# Altium PCB Copy of main - shifted.PcbDoc (part 5 of 15)
Units mil, origin at the board's own origin, x right, y up, seen from the top; angles counter-clockwise.
Board outline 8394.55 x 5164.44 mil, 7 copper layers (Top Layer 1, Layer 2, Layer 3, Unused, Layer 4_pow, Layer 5_gnd, Bottom 6+gnd), stack 46.112 mil thick; 363 components, 409 nets, 1750 pads, 991 vias.
Unrouted connection lines stored in the file: 111.
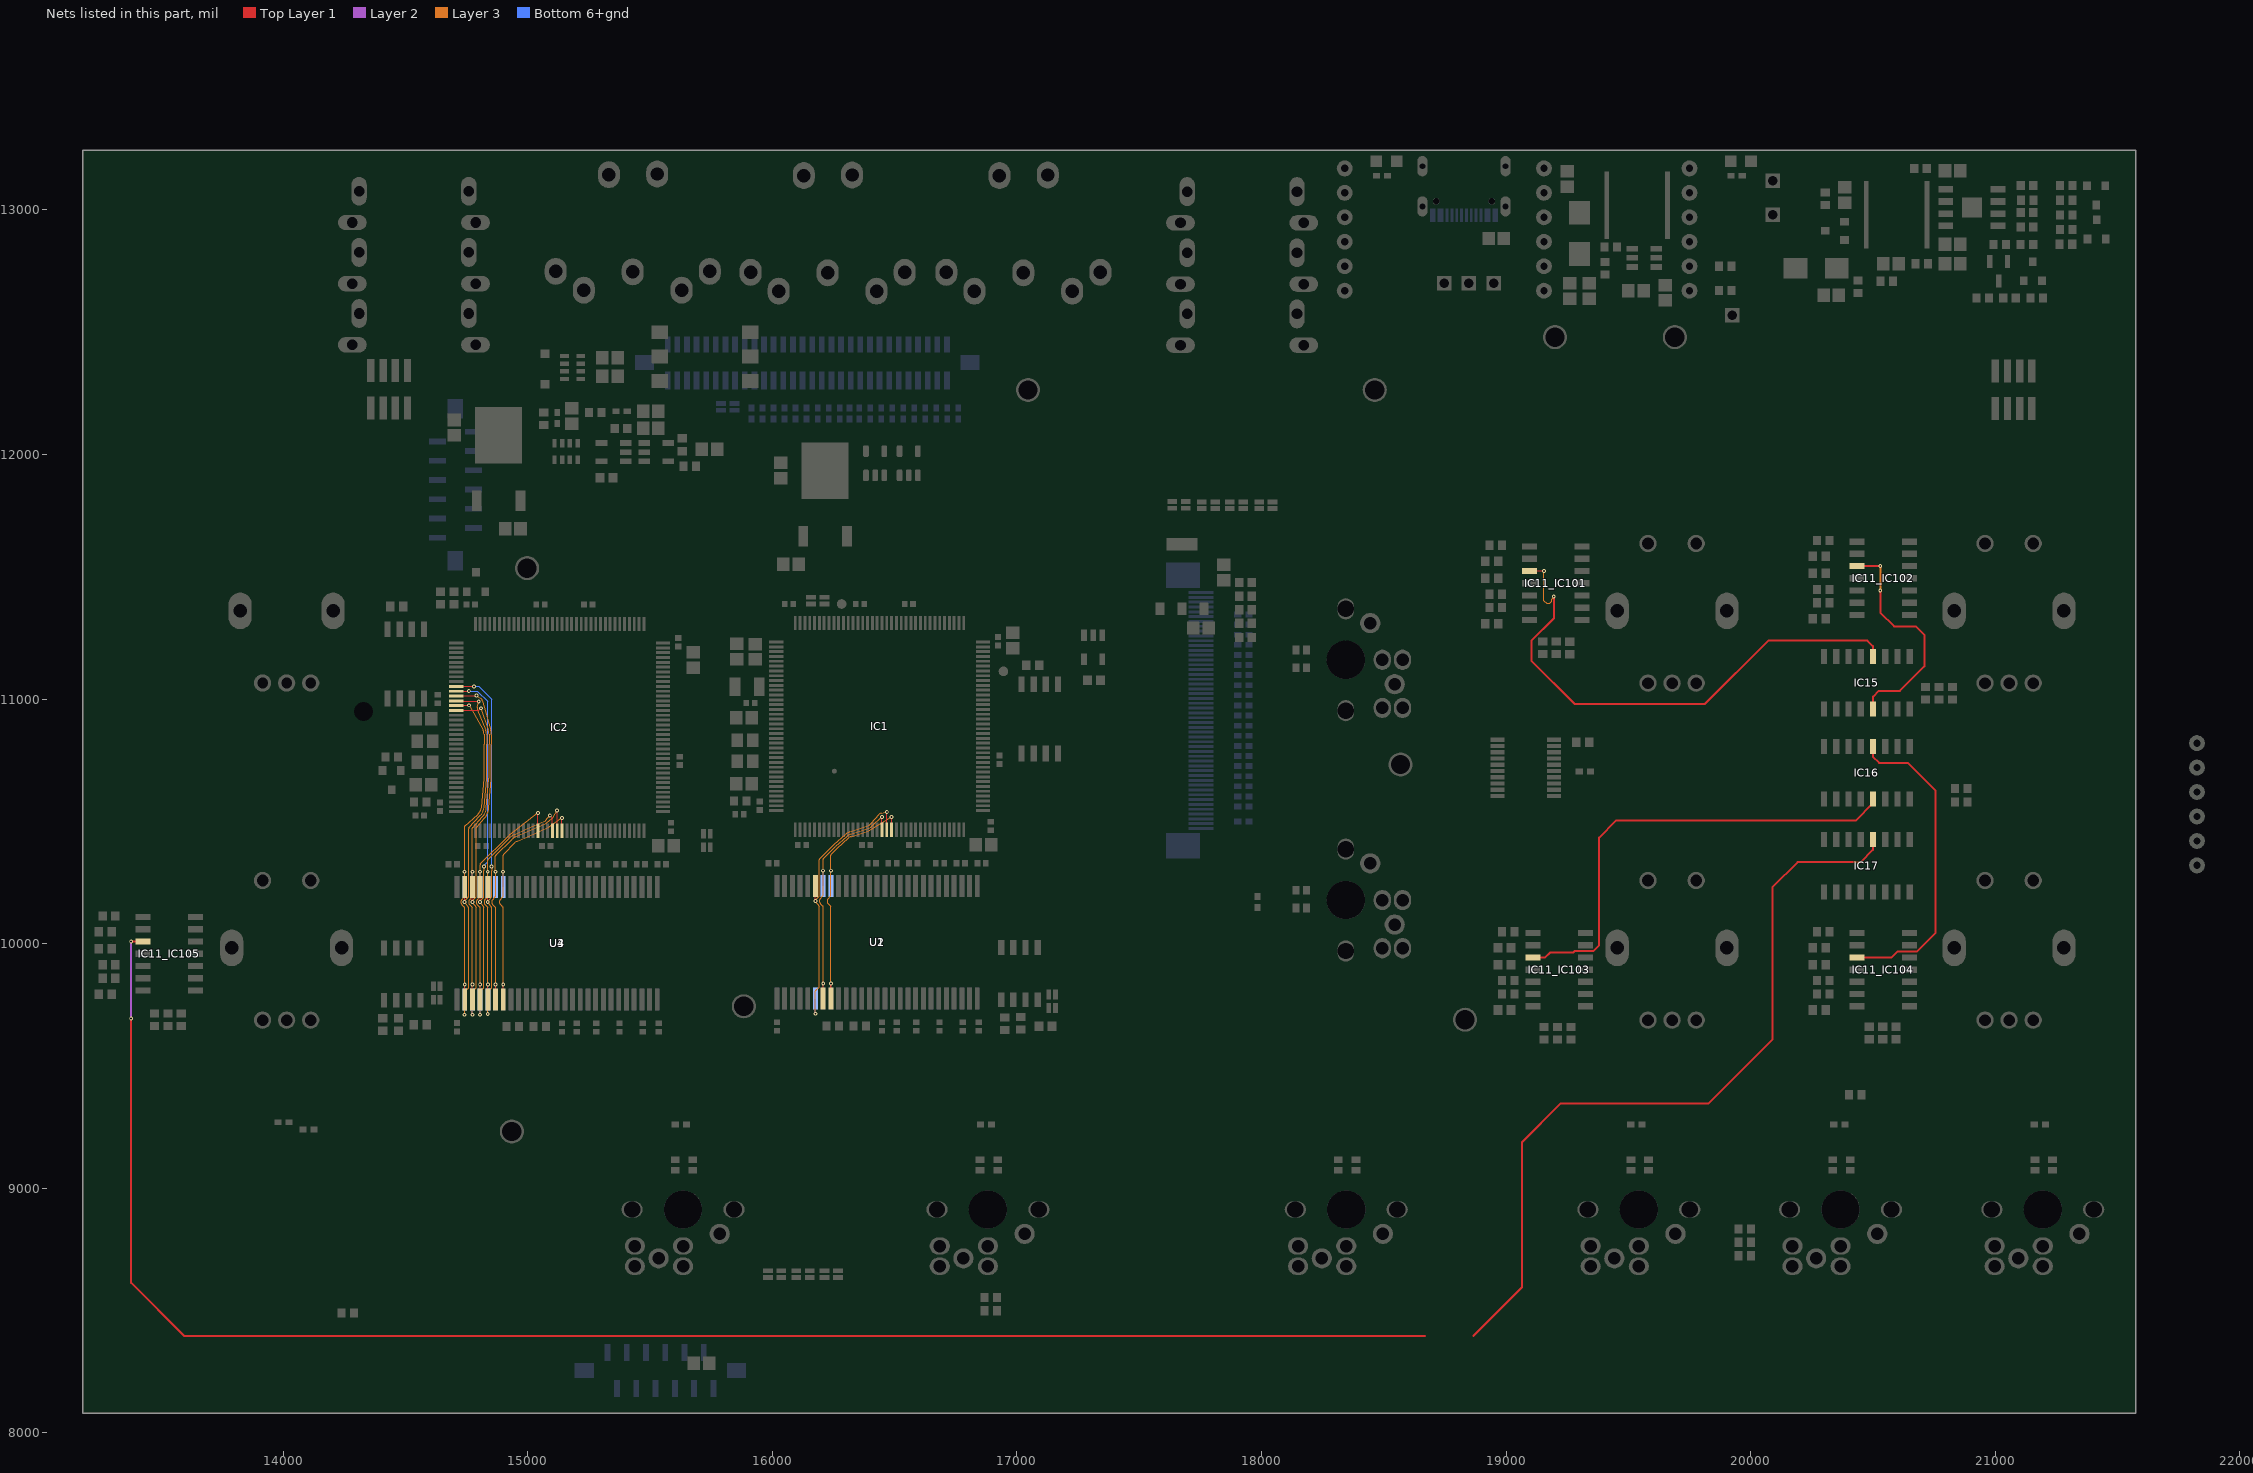
[diagram p8: the nets of this part, all layers, seen from the top]

## Via types
v1: diameter 15.75, hole 7.87, Top Layer 1 to Bottom 6+gnd, tented both sides, 923 vias
v2: diameter 27.56, hole 11.81, Top Layer 1 to Bottom 6+gnd, 45 vias
v3: diameter 23.62/23.62/23.62/23.62/23.62/23.62/23.62 (per signal layer), hole 12, Top Layer 1 to Bottom 6+gnd, tented top, 10 vias
v4: diameter 15.75, hole 7.87, Top Layer 1 to Bottom 6+gnd, 10 vias
v5: diameter 23.62/23.62/23.62/23.62/23.62/23.62/23.62 (per signal layer), hole 12, Top Layer 1 to Bottom 6+gnd, tented bottom, 3 vias

## Nets (pads, with @x,y where several pads share a name; then routed paths per layer and width w, separated by ;. In a path a pad name is that pad's centre, name@x,y a point inside that pad or via, vN(x,y) a via of type N, cw(c..) or ccw(c..) an arc to the next point about the centre after c; other vN are vias at no path point) (continued)
A9: IC1.55 U1.34 U2.34 | length 1531.6
  Top Layer 1 w5: U1.34@16207.68,9775.59 v1@16207.68,9837.43 ; U1.34@16207.92,9775.83 v1(16207.92,9837.68) ; U1.34@16208.17,9775.59 v1@16208.17,9837.43 ; IC1.55@16447.99,10466.06 v1@16447.99,10518.35
  Layer 3 w5: v1(16207.92,9837.68) 16207.92,10149.83 ; 16207.92,10199.75 16207.92,10297.82 v1(16207.43,10298.31) 16207.43,10344.65 ; v1(16447.76,10518.58) 16407.89,10481.61 cw(c16370.24,10522.2) 16387.41,10469.56 16319.11,10447.27 ; 16206.47,10153.31 cw(c16202.92,10149.78) 16207.92,10149.87 ; 16206.47,10153.31 cw(c16202.92,10149.78) 16207.92,10149.87 ; 16206.47,10153.31 cw(c16202.92,10149.78) 16207.92,10149.87 ; 16206.47,10153.31 cw(c16202.92,10149.78) 16207.92,10149.87 ; 16206.47,10153.31 cw(c16202.92,10149.78) 16207.92,10149.87 ; 16206.47,10153.31 cw(c16202.92,10149.78) 16207.92,10149.87 ; 16206.47,10153.31 cw(c16202.92,10149.78) 16207.92,10149.87 ; 16206.47,10153.31 cw(c16202.92,10149.78) 16207.92,10149.87 ; 16206.47,10153.31 cw(c16202.92,10149.78) 16207.92,10149.87 ; 16206.47,10153.31 cw(c16202.92,10149.78) 16207.92,10149.87 ; 16206.47,10153.31 cw(c16202.92,10149.78) 16207.92,10149.87 ; 16206.47,10153.31 cw(c16202.92,10149.78) 16207.92,10149.87 ; 16206.47,10153.31 cw(c16202.92,10149.78) 16207.92,10149.87 ; 16206.47,10153.31 cw(c16202.92,10149.78) 16207.92,10149.87 ; 16206.47,10153.31 cw(c16202.92,10149.78) 16207.92,10149.87 ; 16206.47,10153.31 cw(c16202.92,10149.78) 16207.92,10149.87 ; 16206.47,10153.31 16196.54,10163.28 cw(c16207.43,10174.13) 16195.91,10184.31 16206.67,10196.48 ; 16206.67,10196.48 ccw(c16202.92,10199.79) 16207.92,10199.7 ; 16206.67,10196.48 ccw(c16202.92,10199.79) 16207.92,10199.7 ; 16206.67,10196.48 ccw(c16202.92,10199.79) 16207.92,10199.7 ; 16206.67,10196.48 ccw(c16202.92,10199.79) 16207.92,10199.7 ; 16206.67,10196.48 ccw(c16202.92,10199.79) 16207.92,10199.7 ; 16206.67,10196.48 ccw(c16202.92,10199.79) 16207.92,10199.7 ; 16206.67,10196.48 ccw(c16202.92,10199.79) 16207.92,10199.7 ; 16206.67,10196.48 ccw(c16202.92,10199.79) 16207.92,10199.7 ; 16206.67,10196.48 ccw(c16202.92,10199.79) 16207.92,10199.7 ; 16206.67,10196.48 ccw(c16202.92,10199.79) 16207.92,10199.7 ; 16206.67,10196.48 ccw(c16202.92,10199.79) 16207.92,10199.7 ; 16206.67,10196.48 ccw(c16202.92,10199.79) 16207.92,10199.7 ; 16206.67,10196.48 ccw(c16202.92,10199.79) 16207.92,10199.7 ; 16206.67,10196.48 ccw(c16202.92,10199.79) 16207.92,10199.7 ; 16206.67,10196.48 ccw(c16202.92,10199.79) 16207.92,10199.7 ; 16206.67,10196.48 ccw(c16202.92,10199.79) 16207.92,10199.7 ; 16207.43,10344.65 cw(c16212.43,10344.65) 16208.88,10348.17 ; 16207.43,10344.65 cw(c16212.43,10344.65) 16208.88,10348.17 ; 16207.43,10344.65 cw(c16212.43,10344.65) 16208.88,10348.17 ; 16207.43,10344.65 cw(c16212.43,10344.65) 16208.88,10348.17 ; 16207.43,10344.65 cw(c16212.43,10344.65) 16208.88,10348.17 ; 16207.43,10344.65 cw(c16212.43,10344.65) 16208.88,10348.17 ; 16207.43,10344.65 cw(c16212.43,10344.65) 16208.88,10348.17 ; 16207.43,10344.65 cw(c16212.43,10344.65) 16208.88,10348.17 ; 16207.43,10344.65 cw(c16212.43,10344.65) 16208.88,10348.17 ; 16207.43,10344.65 cw(c16212.43,10344.65) 16208.88,10348.17 ; 16207.43,10344.65 cw(c16212.43,10344.65) 16208.88,10348.17 ; 16207.43,10344.65 cw(c16212.43,10344.65) 16208.88,10348.17 ; 16207.43,10344.65 cw(c16212.43,10344.65) 16208.88,10348.17 ; 16207.43,10344.65 cw(c16212.43,10344.65) 16208.88,10348.17 ; 16207.43,10344.65 cw(c16212.43,10344.65) 16208.88,10348.17 ; 16207.43,10344.65 cw(c16212.43,10344.65) 16208.88,10348.17 ; 16208.88,10348.17 16257.8,10397.09 ; 16257.8,10397.09 cw(c16275.42,10379.36) 16258.92,10398.14 ; 16257.8,10397.09 cw(c16275.42,10379.36) 16258.92,10398.14 ; 16257.8,10397.09 cw(c16275.42,10379.36) 16258.92,10398.14 ; 16257.8,10397.09 cw(c16275.42,10379.36) 16258.92,10398.14 ; 16257.8,10397.09 cw(c16275.42,10379.36) 16258.92,10398.14 ; 16257.8,10397.09 cw(c16275.42,10379.36) 16258.92,10398.14 ; 16257.8,10397.09 cw(c16275.42,10379.36) 16258.92,10398.14 ; 16257.8,10397.09 cw(c16275.42,10379.36) 16258.92,10398.14 ; 16257.8,10397.09 cw(c16275.42,10379.36) 16258.92,10398.14 ; 16257.8,10397.09 cw(c16275.42,10379.36) 16258.92,10398.14 ; 16257.8,10397.09 cw(c16275.42,10379.36) 16258.92,10398.14 ; 16257.8,10397.09 cw(c16275.42,10379.36) 16258.92,10398.14 ; 16257.8,10397.09 cw(c16275.42,10379.36) 16258.92,10398.14 ; 16257.8,10397.09 cw(c16275.42,10379.36) 16258.92,10398.14 ; 16257.8,10397.09 cw(c16275.42,10379.36) 16258.92,10398.14 ; 16257.8,10397.09 cw(c16275.42,10379.36) 16258.92,10398.14 ; 16258.92,10398.14 16306.51,10440.1 ; 16306.51,10440.1 cw(c16329.94,10413.6) 16319.11,10447.27 ; 16306.51,10440.1 cw(c16329.94,10413.6) 16319.11,10447.27 ; 16306.51,10440.1 cw(c16329.94,10413.6) 16319.11,10447.27 ; 16306.51,10440.1 cw(c16329.94,10413.6) 16319.11,10447.27 ; 16306.51,10440.1 cw(c16329.94,10413.6) 16319.11,10447.27 ; 16306.51,10440.1 cw(c16329.94,10413.6) 16319.11,10447.27 ; 16306.51,10440.1 cw(c16329.94,10413.6) 16319.11,10447.27 ; 16306.51,10440.1 cw(c16329.94,10413.6) 16319.11,10447.27 ; 16306.51,10440.1 cw(c16329.94,10413.6) 16319.11,10447.27 ; 16306.51,10440.1 cw(c16329.94,10413.6) 16319.11,10447.27 ; 16306.51,10440.1 cw(c16329.94,10413.6) 16319.11,10447.27 ; 16306.51,10440.1 cw(c16329.94,10413.6) 16319.11,10447.27 ; 16306.51,10440.1 cw(c16329.94,10413.6) 16319.11,10447.27 ; 16306.51,10440.1 cw(c16329.94,10413.6) 16319.11,10447.27 ; 16306.51,10440.1 cw(c16329.94,10413.6) 16319.11,10447.27 ; 16306.5,10440.1 cw(c16329.94,10413.6) 16319.11,10447.27
  Bottom 6+gnd w5: U2.34@16207.68,10236.22 v1@16207.68,10298.06
A10: IC1.56 U1.22 U2.22 | length 1769.5
  Top Layer 1 w5: v1@16175.94,10174.38 U1.22@16175.94,10235.97 ; IC1.56@16467.84,10465.9 v1@16467.84,10538.5
  Layer 3 w5: v1(16175.94,9713.5) 16175.94,9805.11 cw(c16180.94,9805.12) 16177.38,9808.63 16190.6,9821.89 ; v1(16175.94,10174.13) ccw(c16180.09,10176.92) 16176.02,10174.01 16191.13,10152.83 ; v1@16175.94,10179.83 16175.94,10179.7 cw(c16180.09,10176.92) 16176.52,10180.41 16190.6,10194.54 ; 16192.06,9825.38 16192.06,10150.02 ; 16252.27,10405.61 ccw(c16275.42,10379.36) 16250.75,10404.18 16193.5,10346.93 ; 16252.28,10405.61 16299.92,10447.63 cw(c16329.94,10413.6) 16315.98,10456.77 16384.31,10479.07 ; v1(16467.76,10538.58) 16444.54,10533.62 ccw(c16447.76,10518.58) 16436.18,10528.7 16404.4,10492.34 ; 16190.6,9821.89 ccw(c16187.06,9825.42) 16192.06,9825.33 ; 16190.6,9821.89 ccw(c16187.06,9825.42) 16192.06,9825.33 ; 16190.6,9821.89 ccw(c16187.06,9825.42) 16192.06,9825.33 ; 16190.6,9821.89 ccw(c16187.06,9825.42) 16192.06,9825.33 ; 16190.6,9821.89 ccw(c16187.06,9825.42) 16192.06,9825.33 ; 16190.6,9821.89 ccw(c16187.06,9825.42) 16192.06,9825.33 ; 16190.6,9821.89 ccw(c16187.06,9825.42) 16192.06,9825.33 ; 16190.6,9821.89 ccw(c16187.06,9825.42) 16192.06,9825.33 ; 16190.6,9821.89 ccw(c16187.06,9825.42) 16192.06,9825.33 ; 16190.6,9821.89 ccw(c16187.06,9825.42) 16192.06,9825.33 ; 16190.6,9821.89 ccw(c16187.06,9825.42) 16192.06,9825.33 ; 16190.6,9821.89 ccw(c16187.06,9825.42) 16192.06,9825.33 ; 16190.6,9821.89 ccw(c16187.06,9825.42) 16192.06,9825.33 ; 16190.6,9821.89 ccw(c16187.06,9825.42) 16192.06,9825.33 ; 16190.6,9821.89 ccw(c16187.06,9825.42) 16192.06,9825.33 ; 16190.6,9821.89 ccw(c16187.06,9825.42) 16192.06,9825.33 ; 16190.6,10194.54 ccw(c16187.06,10198.07) 16192.06,10197.98 ; 16190.6,10194.54 ccw(c16187.06,10198.07) 16192.06,10197.98 ; 16190.6,10194.54 ccw(c16187.06,10198.07) 16192.06,10197.98 ; 16190.6,10194.54 ccw(c16187.06,10198.07) 16192.06,10197.98 ; 16190.6,10194.54 ccw(c16187.06,10198.07) 16192.06,10197.98 ; 16190.6,10194.54 ccw(c16187.06,10198.07) 16192.06,10197.98 ; 16190.6,10194.54 ccw(c16187.06,10198.07) 16192.06,10197.98 ; 16190.6,10194.54 ccw(c16187.06,10198.07) 16192.06,10197.98 ; 16190.6,10194.54 ccw(c16187.06,10198.07) 16192.06,10197.98 ; 16190.6,10194.54 ccw(c16187.06,10198.07) 16192.06,10197.98 ; 16190.6,10194.54 ccw(c16187.06,10198.07) 16192.06,10197.98 ; 16190.6,10194.54 ccw(c16187.06,10198.07) 16192.06,10197.98 ; 16190.6,10194.54 ccw(c16187.06,10198.07) 16192.06,10197.98 ; 16190.6,10194.54 ccw(c16187.06,10198.07) 16192.06,10197.98 ; 16190.6,10194.54 ccw(c16187.06,10198.07) 16192.06,10197.98 ; 16190.6,10194.54 ccw(c16187.06,10198.07) 16192.06,10197.98 ; 16191.13,10152.83 cw(c16187.06,10149.93) 16192.06,10150.02 ; 16191.13,10152.83 cw(c16187.06,10149.93) 16192.06,10150.02 ; 16191.13,10152.83 cw(c16187.06,10149.93) 16192.06,10150.02 ; 16191.13,10152.83 cw(c16187.06,10149.93) 16192.06,10150.02 ; 16191.13,10152.83 cw(c16187.06,10149.93) 16192.06,10150.02 ; 16191.13,10152.83 cw(c16187.06,10149.93) 16192.06,10150.02 ; 16191.13,10152.83 cw(c16187.06,10149.93) 16192.06,10150.02 ; 16191.13,10152.83 cw(c16187.06,10149.93) 16192.06,10150.02 ; 16191.13,10152.83 cw(c16187.06,10149.93) 16192.06,10150.02 ; 16191.13,10152.83 cw(c16187.06,10149.93) 16192.06,10150.02 ; 16191.13,10152.83 cw(c16187.06,10149.93) 16192.06,10150.02 ; 16191.13,10152.83 cw(c16187.06,10149.93) 16192.06,10150.02 ; 16191.13,10152.83 cw(c16187.06,10149.93) 16192.06,10150.02 ; 16191.13,10152.83 cw(c16187.06,10149.93) 16192.06,10150.02 ; 16191.13,10152.83 cw(c16187.06,10149.93) 16192.06,10150.02 ; 16191.13,10152.83 cw(c16187.06,10149.93) 16192.06,10150.02 ; 16192.06,10198.02 16192.06,10343.42 ; 16192.06,10343.42 cw(c16197.06,10343.42) 16193.5,10346.93 ; 16192.06,10343.42 cw(c16197.06,10343.42) 16193.5,10346.93 ; 16192.06,10343.42 cw(c16197.06,10343.42) 16193.5,10346.93 ; 16192.06,10343.42 cw(c16197.06,10343.42) 16193.5,10346.93 ; 16192.06,10343.42 cw(c16197.06,10343.42) 16193.5,10346.93 ; 16192.06,10343.42 cw(c16197.06,10343.42) 16193.5,10346.93 ; 16192.06,10343.42 cw(c16197.06,10343.42) 16193.5,10346.93 ; 16192.06,10343.42 cw(c16197.06,10343.42) 16193.5,10346.93 ; 16192.06,10343.42 cw(c16197.06,10343.42) 16193.5,10346.93 ; 16192.06,10343.42 cw(c16197.06,10343.42) 16193.5,10346.93 ; 16192.06,10343.42 cw(c16197.06,10343.42) 16193.5,10346.93 ; 16192.06,10343.42 cw(c16197.06,10343.42) 16193.5,10346.93 ; 16192.06,10343.42 cw(c16197.06,10343.42) 16193.5,10346.93 ; 16192.06,10343.42 cw(c16197.06,10343.42) 16193.5,10346.93 ; 16192.06,10343.42 cw(c16197.06,10343.42) 16193.5,10346.93 ; 16192.06,10343.42 cw(c16197.06,10343.42) 16193.5,10346.93 ; 16384.31,10479.07 ccw(c16370.24,10522.2) 16404.4,10492.34 ; 16384.31,10479.07 ccw(c16370.24,10522.2) 16404.4,10492.34 ; 16384.31,10479.07 ccw(c16370.24,10522.2) 16404.4,10492.34 ; 16384.31,10479.07 ccw(c16370.24,10522.2) 16404.4,10492.34 ; 16384.31,10479.07 ccw(c16370.24,10522.2) 16404.4,10492.34 ; 16384.31,10479.07 ccw(c16370.24,10522.2) 16404.4,10492.34 ; 16384.31,10479.07 ccw(c16370.24,10522.2) 16404.4,10492.34 ; 16384.31,10479.07 ccw(c16370.24,10522.2) 16404.4,10492.34 ; 16384.31,10479.07 ccw(c16370.24,10522.2) 16404.4,10492.34 ; 16384.31,10479.07 ccw(c16370.24,10522.2) 16404.4,10492.34 ; 16384.31,10479.07 ccw(c16370.24,10522.2) 16404.4,10492.34 ; 16384.31,10479.07 ccw(c16370.24,10522.2) 16404.4,10492.34 ; 16384.31,10479.07 ccw(c16370.24,10522.2) 16404.4,10492.34 ; 16384.31,10479.07 ccw(c16370.24,10522.2) 16404.4,10492.34 ; 16384.31,10479.07 ccw(c16370.24,10522.2) 16404.4,10492.34 ; 16384.31,10479.07 ccw(c16370.24,10522.2) 16404.4,10492.34
  Bottom 6+gnd w5: v1@16176.18,9713.75 U2.22@16176.18,9775.59
A11: IC1.57 U1.35 U2.35 | length 1544.4
  Top Layer 1 w5: U1.35@16239.17,9775.59 v1@16239.17,9837.43 ; U1.35@16239.42,9775.83 v1(16239.42,9837.68) ; U1.35@16239.66,9775.59 v1@16239.66,9837.43 ; IC1.57@16487.36,10466.06 v1@16487.36,10518.35
  Layer 3 w5: v1(16239.42,9837.68) 16239.42,10149.83 ; 16239.42,10199.75 16239.42,10297.82 v1(16238.93,10298.31) 16238.93,10362 ; v1(16487.13,10518.58) 16405.08,10466.89 ; 16237.96,10153.31 cw(c16234.42,10149.78) 16239.42,10149.87 ; 16237.96,10153.31 cw(c16234.42,10149.78) 16239.42,10149.87 ; 16237.96,10153.31 cw(c16234.42,10149.78) 16239.42,10149.87 ; 16237.96,10153.31 cw(c16234.42,10149.78) 16239.42,10149.87 ; 16237.96,10153.31 cw(c16234.42,10149.78) 16239.42,10149.87 ; 16237.96,10153.31 cw(c16234.42,10149.78) 16239.42,10149.87 ; 16237.96,10153.31 cw(c16234.42,10149.78) 16239.42,10149.87 ; 16237.96,10153.31 cw(c16234.42,10149.78) 16239.42,10149.87 ; 16237.96,10153.31 cw(c16234.42,10149.78) 16239.42,10149.87 ; 16237.96,10153.31 cw(c16234.42,10149.78) 16239.42,10149.87 ; 16237.96,10153.31 cw(c16234.42,10149.78) 16239.42,10149.87 ; 16237.96,10153.31 cw(c16234.42,10149.78) 16239.42,10149.87 ; 16237.96,10153.31 cw(c16234.42,10149.78) 16239.42,10149.87 ; 16237.96,10153.31 cw(c16234.42,10149.78) 16239.42,10149.87 ; 16237.96,10153.31 cw(c16234.42,10149.78) 16239.42,10149.87 ; 16237.96,10153.31 cw(c16234.42,10149.78) 16239.42,10149.87 ; 16237.96,10153.31 16228.03,10163.28 cw(c16238.93,10174.13) 16227.4,10184.31 16238.16,10196.48 ; 16238.16,10196.48 ccw(c16234.42,10199.79) 16239.42,10199.7 ; 16238.16,10196.48 ccw(c16234.42,10199.79) 16239.42,10199.7 ; 16238.16,10196.48 ccw(c16234.42,10199.79) 16239.42,10199.7 ; 16238.16,10196.48 ccw(c16234.42,10199.79) 16239.42,10199.7 ; 16238.16,10196.48 ccw(c16234.42,10199.79) 16239.42,10199.7 ; 16238.16,10196.48 ccw(c16234.42,10199.79) 16239.42,10199.7 ; 16238.16,10196.48 ccw(c16234.42,10199.79) 16239.42,10199.7 ; 16238.16,10196.48 ccw(c16234.42,10199.79) 16239.42,10199.7 ; 16238.16,10196.48 ccw(c16234.42,10199.79) 16239.42,10199.7 ; 16238.16,10196.48 ccw(c16234.42,10199.79) 16239.42,10199.7 ; 16238.16,10196.48 ccw(c16234.42,10199.79) 16239.42,10199.7 ; 16238.16,10196.48 ccw(c16234.42,10199.79) 16239.42,10199.7 ; 16238.16,10196.48 ccw(c16234.42,10199.79) 16239.42,10199.7 ; 16238.16,10196.48 ccw(c16234.42,10199.79) 16239.42,10199.7 ; 16238.16,10196.48 ccw(c16234.42,10199.79) 16239.42,10199.7 ; 16238.16,10196.48 ccw(c16234.42,10199.79) 16239.42,10199.7 ; 16238.93,10362 cw(c16243.93,10362) 16240.37,10365.52 ; 16238.93,10362 cw(c16243.93,10362) 16240.37,10365.52 ; 16238.93,10362 cw(c16243.93,10362) 16240.37,10365.52 ; 16238.93,10362 cw(c16243.93,10362) 16240.37,10365.52 ; 16238.93,10362 cw(c16243.93,10362) 16240.37,10365.52 ; 16238.93,10362 cw(c16243.93,10362) 16240.37,10365.52 ; 16238.93,10362 cw(c16243.93,10362) 16240.37,10365.52 ; 16238.93,10362 cw(c16243.93,10362) 16240.37,10365.52 ; 16238.93,10362 cw(c16243.93,10362) 16240.37,10365.52 ; 16238.93,10362 cw(c16243.93,10362) 16240.37,10365.52 ; 16238.93,10362 cw(c16243.93,10362) 16240.37,10365.52 ; 16238.93,10362 cw(c16243.93,10362) 16240.37,10365.52 ; 16238.93,10362 cw(c16243.93,10362) 16240.37,10365.52 ; 16238.93,10362 cw(c16243.93,10362) 16240.37,10365.52 ; 16238.93,10362 cw(c16243.93,10362) 16240.37,10365.52 ; 16238.93,10362 cw(c16243.93,10362) 16240.37,10365.52 ; 16240.37,10365.52 16264.86,10390 cw(c16275.42,10379.36) 16265.5,10390.61 16313.15,10432.63 cw(c16329.94,10413.6) 16322.21,10437.77 16390.52,10460.05 ; 16390.52,10460.06 ccw(c16370.24,10522.2) 16405.08,10466.89 ; 16390.52,10460.06 ccw(c16370.24,10522.2) 16405.08,10466.89 ; 16390.52,10460.06 ccw(c16370.24,10522.2) 16405.08,10466.89 ; 16390.52,10460.06 ccw(c16370.24,10522.2) 16405.08,10466.89 ; 16390.52,10460.06 ccw(c16370.24,10522.2) 16405.08,10466.89 ; 16390.52,10460.06 ccw(c16370.24,10522.2) 16405.08,10466.89 ; 16390.52,10460.06 ccw(c16370.24,10522.2) 16405.08,10466.89 ; 16390.52,10460.06 ccw(c16370.24,10522.2) 16405.08,10466.89 ; 16390.52,10460.06 ccw(c16370.24,10522.2) 16405.08,10466.89 ; 16390.52,10460.06 ccw(c16370.24,10522.2) 16405.08,10466.89 ; 16390.52,10460.06 ccw(c16370.24,10522.2) 16405.08,10466.89 ; 16390.52,10460.06 ccw(c16370.24,10522.2) 16405.08,10466.89 ; 16390.52,10460.06 ccw(c16370.24,10522.2) 16405.08,10466.89 ; 16390.52,10460.06 ccw(c16370.24,10522.2) 16405.08,10466.89 ; 16390.52,10460.06 ccw(c16370.24,10522.2) 16405.08,10466.89 ; 16390.52,10460.06 ccw(c16370.24,10522.2) 16405.08,10466.89
  Bottom 6+gnd w5: U2.35@16239.17,10236.22 v1@16239.17,10298.06
A_ENC1: IC11_IC101.10 IC15.12 | length 2171.5
  Top Layer 1 w5: IC11_IC101.10@19095.43,11523.82 v1(19155,11523.82)
  Top Layer 1 w8: v1(19195,11418.82) 19195,11329.56 19103.7,11238.26 19103.7,11156.32 19280.09,10979.93 19813.26,10979.93 20072.66,11239.33 20477,11239.33 20500,11216.33 IC15.12@20500,11173.82
  Layer 3 w5: v1(19155,11523.82) 19155,11402.53 19165.6,11391.93 19178.34,11391.93 19187.34,11400.94 19187.34,11408.25 19195,11415.91 v1(19195,11418.82)
A_ENC2: IC11_IC102.10 IC15.5 | length 943.5
  Top Layer 1 w8: IC11_IC102.10@20435,11543.82 v1(20530,11543.82) ; IC15.5@20500,10959.25 20500.66,10959.92 20500.66,11010.32 20524.17,11033.82 20609.94,11033.82 20710,11133.88 20710,11262.77 20675.8,11296.97 20586.85,11296.97 20530,11353.82 v1(20530,11443.82)
  Layer 3 w8: v1(20530,11443.82) v1(20530,11543.82)
A_ENC3: IC11_IC103.10 IC16.5 | length 1926.6
  Top Layer 1 w8: IC11_IC103.10@19110.43,9943.82 19160,9943.82 19180,9963.82 19275,9963.82 19281.74,9970.56 19357.77,9970.56 19380,9992.78 19380,10433.82 19449.06,10502.88 20429.06,10502.88 20500,10573.82 IC16.5@20500,10591.53
A_ENC4: IC11_IC104.10 IC16.12 | length 1298.6
  Top Layer 1 w8: IC11_IC104.10@20435,9943.82 20490,9943.82 20576.05,9943.82 20601.05,9968.82 20680.6,9968.82 20755,10043.22 20755,10626.52 20642.7,10738.82 20525,10738.82 20500,10763.82 IC16.12@20500,10806.1
A_ENC5: IC11_IC105.10 IC17.12 | length 10037
  Top Layer 1 w8: v1(13378.15,9693.82) 13378.15,8613.22 13595.55,8395.82 18668.92,8395.82 ; v1@13378.15,10008.82 IC11_IC105.10@13425.86,10008.82 ; 18865.77,8395.82 19065,8595.05 19065,9188.82 19222,9345.82 19827,9345.82 20090,9608.82 20090,10232.05 20191.77,10333.82 20450,10333.82 20500,10383.82 IC17.12@20500,10426.1
  Layer 2 w8: v1(13378.15,9693.82) v1(13378.15,10008.82)
AA0: IC2.10 U3.23 U4.23 | length 1693
  Top Layer 1 w5: IC2.10@14707.09,11051.95 IC2.10@14707.15,11051.95 v1@14779.69,11051.95 ; v1(14836.14,10169.94) 14836.39,10169.94 U3.23@14836.39,10232.03
  Layer 3 w5: v1(14836.02,9711.82) 14836.02,9802.87 14852.26,9819.12 14852.26,10145.78 ; v1(14851.97,10315.92) 14852.26,10298.12 ; 14852.26,10193.83 14852.26,10298.06 ; 14851.21,10148.8 cw(c14847.26,10145.74) 14852.26,10145.83 ; 14851.21,10148.8 cw(c14847.26,10145.74) 14852.26,10145.83 ; 14851.21,10148.8 cw(c14847.26,10145.74) 14852.26,10145.83 ; 14851.21,10148.8 cw(c14847.26,10145.74) 14852.26,10145.83 ; 14851.21,10148.8 cw(c14847.26,10145.74) 14852.26,10145.83 ; 14851.21,10148.8 cw(c14847.26,10145.74) 14852.26,10145.83 ; 14851.21,10148.8 cw(c14847.26,10145.74) 14852.26,10145.83 ; 14851.21,10148.8 cw(c14847.26,10145.74) 14852.26,10145.83 ; 14851.21,10148.8 cw(c14847.26,10145.74) 14852.26,10145.83 ; 14851.21,10148.8 cw(c14847.26,10145.74) 14852.26,10145.83 ; 14851.21,10148.8 cw(c14847.26,10145.74) 14852.26,10145.83 ; 14851.21,10148.8 cw(c14847.26,10145.74) 14852.26,10145.83 ; 14851.21,10148.8 cw(c14847.26,10145.74) 14852.26,10145.83 ; 14851.21,10148.8 cw(c14847.26,10145.74) 14852.26,10145.83 ; 14851.21,10148.8 cw(c14847.26,10145.74) 14852.26,10145.83 ; 14851.21,10148.8 cw(c14847.26,10145.74) 14852.26,10145.83 ; 14851.21,10148.8 14837.22,10166.84 cw(c14841.14,10169.94) v1(14836.14,10169.94) 14836.14,10170 cw(c14841.14,10169.94) 14837.21,10173.04 14851.19,10190.79 ; 14851.19,10190.79 ccw(c14847.26,10193.88) 14852.26,10193.79 ; 14851.19,10190.79 ccw(c14847.26,10193.88) 14852.26,10193.79 ; 14851.19,10190.79 ccw(c14847.26,10193.88) 14852.26,10193.79 ; 14851.19,10190.79 ccw(c14847.26,10193.88) 14852.26,10193.79 ; 14851.19,10190.79 ccw(c14847.26,10193.88) 14852.26,10193.79 ; 14851.19,10190.79 ccw(c14847.26,10193.88) 14852.26,10193.79 ; 14851.19,10190.79 ccw(c14847.26,10193.88) 14852.26,10193.79 ; 14851.19,10190.79 ccw(c14847.26,10193.88) 14852.26,10193.79 ; 14851.19,10190.79 ccw(c14847.26,10193.88) 14852.26,10193.79 ; 14851.19,10190.79 ccw(c14847.26,10193.88) 14852.26,10193.79 ; 14851.19,10190.79 ccw(c14847.26,10193.88) 14852.26,10193.79 ; 14851.19,10190.79 ccw(c14847.26,10193.88) 14852.26,10193.79 ; 14851.19,10190.79 ccw(c14847.26,10193.88) 14852.26,10193.79 ; 14851.19,10190.79 ccw(c14847.26,10193.88) 14852.26,10193.79 ; 14851.19,10190.79 ccw(c14847.26,10193.88) 14852.26,10193.79 ; 14851.19,10190.79 ccw(c14847.26,10193.88) 14852.26,10193.79 ; 14852.26,10298.06 ccw(c14847.26,10298.04) 14852.26,10298.12 ; 14852.26,10298.06 ccw(c14847.26,10298.04) 14852.26,10298.12 ; 14852.26,10298.06 ccw(c14847.26,10298.04) 14852.26,10298.12 ; 14852.26,10298.06 ccw(c14847.26,10298.04) 14852.26,10298.12 ; 14852.26,10298.06 ccw(c14847.26,10298.04) 14852.26,10298.12
  Bottom 6+gnd w5: v1(14779.77,11052.03) 14799.71,11052.03 14851.97,10999.77 v1(14851.97,10315.92) ; v1@14836.39,9709.56 U4.23@14836.39,9771.4
AA1: IC2.11 U3.24 U4.24 | length 1673
  Top Layer 1 w5: IC2.11@14707.25,11032.42 14707.29,11032.46 14758.44,11032.46 v1(14758.64,11032.66) ; v1@14804.89,10170.19 U3.24@14804.89,10232.03
  Layer 3 w5: v1(14804.64,9709.31) 14804.64,9803 14820.77,9819.12 14820.77,10145.78 ; v1(14804.64,10169.94) ccw(c14808.8,10172.73) 14804.73,10169.82 14819.84,10148.64 ; v1@14804.64,10175.64 14804.64,10175.51 cw(c14808.8,10172.73) 14805.23,10176.22 14819.31,10190.35 ; v1(14820.48,10315.92) 14820.77,10298.12 ; 14820.77,10193.83 14820.77,10298.06 ; 14819.31,10190.35 ccw(c14815.77,10193.88) 14820.77,10193.79 ; 14819.31,10190.35 ccw(c14815.77,10193.88) 14820.77,10193.79 ; 14819.31,10190.35 ccw(c14815.77,10193.88) 14820.77,10193.79 ; 14819.31,10190.35 ccw(c14815.77,10193.88) 14820.77,10193.79 ; 14819.31,10190.35 ccw(c14815.77,10193.88) 14820.77,10193.79 ; 14819.31,10190.35 ccw(c14815.77,10193.88) 14820.77,10193.79 ; 14819.31,10190.35 ccw(c14815.77,10193.88) 14820.77,10193.79 ; 14819.31,10190.35 ccw(c14815.77,10193.88) 14820.77,10193.79 ; 14819.31,10190.35 ccw(c14815.77,10193.88) 14820.77,10193.79 ; 14819.31,10190.35 ccw(c14815.77,10193.88) 14820.77,10193.79 ; 14819.31,10190.35 ccw(c14815.77,10193.88) 14820.77,10193.79 ; 14819.31,10190.35 ccw(c14815.77,10193.88) 14820.77,10193.79 ; 14819.31,10190.35 ccw(c14815.77,10193.88) 14820.77,10193.79 ; 14819.31,10190.35 ccw(c14815.77,10193.88) 14820.77,10193.79 ; 14819.31,10190.35 ccw(c14815.77,10193.88) 14820.77,10193.79 ; 14819.31,10190.35 ccw(c14815.77,10193.88) 14820.77,10193.79 ; 14819.84,10148.64 cw(c14815.77,10145.74) 14820.77,10145.83 ; 14819.84,10148.64 cw(c14815.77,10145.74) 14820.77,10145.83 ; 14819.84,10148.64 cw(c14815.77,10145.74) 14820.77,10145.83 ; 14819.84,10148.64 cw(c14815.77,10145.74) 14820.77,10145.83 ; 14819.84,10148.64 cw(c14815.77,10145.74) 14820.77,10145.83 ; 14819.84,10148.64 cw(c14815.77,10145.74) 14820.77,10145.83 ; 14819.84,10148.64 cw(c14815.77,10145.74) 14820.77,10145.83 ; 14819.84,10148.64 cw(c14815.77,10145.74) 14820.77,10145.83 ; 14819.84,10148.64 cw(c14815.77,10145.74) 14820.77,10145.83 ; 14819.84,10148.64 cw(c14815.77,10145.74) 14820.77,10145.83 ; 14819.84,10148.64 cw(c14815.77,10145.74) 14820.77,10145.83 ; 14819.84,10148.64 cw(c14815.77,10145.74) 14820.77,10145.83 ; 14819.84,10148.64 cw(c14815.77,10145.74) 14820.77,10145.83 ; 14819.84,10148.64 cw(c14815.77,10145.74) 14820.77,10145.83 ; 14819.84,10148.64 cw(c14815.77,10145.74) 14820.77,10145.83 ; 14819.84,10148.64 cw(c14815.77,10145.74) 14820.77,10145.83 ; 14820.77,10298.06 ccw(c14815.77,10298.04) 14820.77,10298.12 ; 14820.77,10298.06 ccw(c14815.77,10298.04) 14820.77,10298.12 ; 14820.77,10298.06 ccw(c14815.77,10298.04) 14820.77,10298.12 ; 14820.77,10298.06 ccw(c14815.77,10298.04) 14820.77,10298.12 ; 14820.77,10298.06 ccw(c14815.77,10298.04) 14820.77,10298.12
  Bottom 6+gnd w5: v1(14758.64,11032.66) 14793.56,11032.66 14835.95,10990.27 14835.95,10334.3 14820.48,10318.83 v1(14820.48,10315.92) ; v1@14804.89,9709.56 U4.24@14804.89,9771.4
AA2: IC2.12 U3.25 U4.25 | length 1605
  Top Layer 1 w5: IC2.12@14707.09,11012.58 14708.12,11013.6 14788.83,11013.6 v1(14789.85,11014.63) ; v1@14773.39,10170.19 U3.25@14773.39,10232.03
  Layer 3 w5: v1(14773.15,9709.31) 14773.15,9803 14789.27,9819.12 14789.27,10145.78 ; v1@14773.15,10169.94 ccw(c14777.3,10172.73) 14773.23,10169.82 14788.34,10148.64 ; v1@14773.15,10175.51 cw(c14777.3,10172.73) 14773.73,10176.22 14787.81,10190.35 ccw(c14784.27,10193.88) 14789.27,10193.79 ; 14789.27,10193.83 14789.27,10473.57 cw(c14794.27,10473.57) 14790.54,10476.9 14821.87,10511.9 ccw(c14765.72,10562.18) 14840.81,10555.66 14850.98,10672.13 ccw(c14785.86,10677.89) 14851.05,10673.02 ccw(c14785.86,10677.9) 14851.23,10677.9 14851.24,10815.26 14851.23,10855.21 ccw(c14785.86,10855.26) 14848.82,10872.85 14822.58,10966.76 ccw(c14807.79,10962.57) 14822.54,10966.9 14814.6,10993.96 ccw(c14799.85,10989.63) 14808.31,11002.47 v1(14789.85,11014.63) ; 14788.34,10148.64 cw(c14784.27,10145.74) 14789.27,10145.83 ; 14788.34,10148.64 cw(c14784.27,10145.74) 14789.27,10145.83 ; 14788.34,10148.64 cw(c14784.27,10145.74) 14789.27,10145.83 ; 14788.34,10148.64 cw(c14784.27,10145.74) 14789.27,10145.83 ; 14788.34,10148.64 cw(c14784.27,10145.74) 14789.27,10145.83 ; 14788.34,10148.64 cw(c14784.27,10145.74) 14789.27,10145.83 ; 14788.34,10148.64 cw(c14784.27,10145.74) 14789.27,10145.83 ; 14788.34,10148.64 cw(c14784.27,10145.74) 14789.27,10145.83 ; 14788.34,10148.64 cw(c14784.27,10145.74) 14789.27,10145.83 ; 14788.34,10148.64 cw(c14784.27,10145.74) 14789.27,10145.83 ; 14788.34,10148.64 cw(c14784.27,10145.74) 14789.27,10145.83 ; 14788.34,10148.64 cw(c14784.27,10145.74) 14789.27,10145.83 ; 14788.34,10148.64 cw(c14784.27,10145.74) 14789.27,10145.83 ; 14788.34,10148.64 cw(c14784.27,10145.74) 14789.27,10145.83 ; 14788.34,10148.64 cw(c14784.27,10145.74) 14789.27,10145.83 ; 14788.34,10148.64 cw(c14784.27,10145.74) 14789.27,10145.83
  Bottom 6+gnd w5: v1@14773.39,9709.56 U4.25@14773.39,9771.4
  other v1: 14773.15,10169.94
AA3: IC2.13 U3.26 U4.26 | length 1587
  Top Layer 1 w5: IC2.13@14707.25,10993.05 14709.04,10991.26 14797.74,10991.26 v1(14799.38,10989.63) ; v1@14741.9,10170.19 U3.26@14741.9,10232.03
  Layer 3 w5: v1(14741.65,9709.31) 14741.65,9803 14757.77,9819.12 14757.77,10145.78 ; v1(14741.65,10169.94) ccw(c14745.81,10172.73) 14741.74,10169.82 14756.85,10148.64 ; v1@14741.65,10175.51 cw(c14745.81,10172.73) 14742.23,10176.22 14756.32,10190.35 ccw(c14752.77,10193.88) 14757.77,10193.79 14757.77,10470.36 cw(c14762.77,10470.36) 14759.1,10473.75 14806.26,10524.47 ccw(c14765.72,10562.18) 14820.88,10557.36 14831.06,10673.91 ccw(c14785.86,10677.89) 14831.1,10674.41 ; v1(14799.38,10989.63) 14799.51,10989.5 14799.81,10989.5 14793.05,10966.93 ccw(c14807.79,10962.57) 14793.55,10956.78 14827.89,10872.35 cw(c14785.86,10855.26) 14831.24,10855.26 14831.24,10815.26 14831.24,10677.9 cw(c14785.86,10677.9) 14831.1,10674.45 ; 14756.84,10148.64 cw(c14752.77,10145.74) 14757.77,10145.83 ; 14756.84,10148.64 cw(c14752.77,10145.74) 14757.77,10145.83 ; 14756.84,10148.64 cw(c14752.77,10145.74) 14757.77,10145.83 ; 14756.84,10148.64 cw(c14752.77,10145.74) 14757.77,10145.83 ; 14756.84,10148.64 cw(c14752.77,10145.74) 14757.77,10145.83 ; 14756.84,10148.64 cw(c14752.77,10145.74) 14757.77,10145.83 ; 14756.84,10148.64 cw(c14752.77,10145.74) 14757.77,10145.83 ; 14756.84,10148.64 cw(c14752.77,10145.74) 14757.77,10145.83 ; 14756.84,10148.64 cw(c14752.77,10145.74) 14757.77,10145.83 ; 14756.84,10148.64 cw(c14752.77,10145.74) 14757.77,10145.83 ; 14756.84,10148.64 cw(c14752.77,10145.74) 14757.77,10145.83 ; 14756.84,10148.64 cw(c14752.77,10145.74) 14757.77,10145.83 ; 14756.84,10148.64 cw(c14752.77,10145.74) 14757.77,10145.83 ; 14756.84,10148.64 cw(c14752.77,10145.74) 14757.77,10145.83 ; 14756.84,10148.64 cw(c14752.77,10145.74) 14757.77,10145.83 ; 14756.84,10148.64 cw(c14752.77,10145.74) 14757.77,10145.83
  Bottom 6+gnd w5: v1@14741.9,9709.56 U4.26@14741.9,9771.4
AA4: IC2.14 U3.29 U4.29 | length 1374.6
  Top Layer 1 w5: IC2.14@14707.09,10973.21 14707.8,10973.92 14759.14,10973.92 v1(14759.85,10974.63) ; U3.29@14741.9,9771.4 14741.9,9833.24 v1(14742.14,9833.49)
  Layer 3 w5: v1(14742.14,9833.49) 14742.14,10145.64 ccw(c14737.14,10145.64) 14740.7,10149.16 14730.81,10159.04 cw(c14741.65,10169.94) 14730.15,10180.15 14740.88,10192.24 ccw(c14737.14,10195.56) 14742.14,10195.56 14742.14,10293.63 v1(14741.65,10294.12) 14741.65,10479.09 cw(c14746.65,10479.09) 14743.42,10482.91 14795.39,10527.85 ccw(c14765.72,10562.18) 14810.92,10558.23 14821.1,10674.82 ccw(c14785.86,10677.89) 14821.13,10675.16 ccw(c14785.86,10677.9) 14821.24,10677.9 14821.24,10815.26 14821.24,10855.26 ccw(c14785.86,10855.26) 14816.76,10872.48 v1(14759.85,10974.63)
  Bottom 6+gnd w5: U4.29@14741.9,10232.03 v1@14741.9,10293.87
AA5: IC2.15 U3.30 U4.30 | length 1394.5
  Top Layer 1 w5: IC2.15@14707.25,10953.68 14707.65,10954.08 14799.3,10954.08 v1(14807.79,10962.57) ; U3.30@14773.39,9771.46 v1@14773.39,9833.73
  Layer 3 w5: 14761.62,10180.12 ccw(c14773.15,10169.94) 14762.25,10159.1 14772.18,10149.12 cw(c14768.64,10145.59) 14773.64,10145.68 ; 14761.63,10180.12 14772.38,10192.29 ccw(c14768.64,10195.6) 14773.64,10195.51 ; v1(14773.64,9833.49) 14773.64,10145.64 ; 14773.64,10195.56 14773.64,10293.63 v1(14773.15,10294.12) 14773.15,10471.59 cw(c14778.15,10471.59) 14774.46,10474.97 14813.91,10518 ccw(c14765.72,10562.18) 14830.84,10556.49 14841.02,10673.04 ccw(c14785.86,10677.89) 14841.08,10673.73 ccw(c14785.86,10677.9) 14841.24,10677.9 14841.24,10815.26 14841.24,10855.26 ccw(c14785.86,10855.26) 14838.28,10873.12 v1(14807.79,10962.57)
  Bottom 6+gnd w5: U4.30@14773.39,10232.03 v1@14773.39,10293.87
AA6: IC2.50 U3.31 U4.31 | length 1184.5
  Top Layer 1 w5: U3.31@14804.89,9771.4 v1@14804.89,9833.24 ; IC2.50@15041.42,10461.71 v1@15041.42,10534.31
  Layer 3 w5: v1(14805.13,9833.49) 14805.13,10145.64 ; 14805.13,10195.56 14805.13,10293.63 v1(14804.64,10294.12) 14804.64,10323.38 ; v1(15041.35,10534.39) 14927.7,10447.68 ccw(c14967.12,10396.01) 14921.28,10442.09 14806.09,10326.9 ; 14803.68,10149.12 cw(c14800.13,10145.59) 14805.13,10145.68 ; 14803.68,10149.12 cw(c14800.13,10145.59) 14805.13,10145.68 ; 14803.68,10149.12 cw(c14800.13,10145.59) 14805.13,10145.68 ; 14803.68,10149.12 cw(c14800.13,10145.59) 14805.13,10145.68 ; 14803.68,10149.12 cw(c14800.13,10145.59) 14805.13,10145.68 ; 14803.68,10149.12 cw(c14800.13,10145.59) 14805.13,10145.68 ; 14803.68,10149.12 cw(c14800.13,10145.59) 14805.13,10145.68 ; 14803.68,10149.12 cw(c14800.13,10145.59) 14805.13,10145.68 ; 14803.68,10149.12 cw(c14800.13,10145.59) 14805.13,10145.68 ; 14803.68,10149.12 cw(c14800.13,10145.59) 14805.13,10145.68 ; 14803.68,10149.12 cw(c14800.13,10145.59) 14805.13,10145.68 ; 14803.68,10149.12 cw(c14800.13,10145.59) 14805.13,10145.68 ; 14803.68,10149.12 cw(c14800.13,10145.59) 14805.13,10145.68 ; 14803.68,10149.12 cw(c14800.13,10145.59) 14805.13,10145.68 ; 14803.68,10149.12 cw(c14800.13,10145.59) 14805.13,10145.68 ; 14803.68,10149.12 cw(c14800.13,10145.59) 14805.13,10145.68 ; 14803.68,10149.12 14793.75,10159.1 cw(c14804.64,10169.94) 14793.12,10180.12 14803.88,10192.29 ; 14803.88,10192.29 ccw(c14800.13,10195.6) 14805.13,10195.51 ; 14803.88,10192.29 ccw(c14800.13,10195.6) 14805.13,10195.51 ; 14803.88,10192.29 ccw(c14800.13,10195.6) 14805.13,10195.51 ; 14803.88,10192.29 ccw(c14800.13,10195.6) 14805.13,10195.51 ; 14803.88,10192.29 ccw(c14800.13,10195.6) 14805.13,10195.51 ; 14803.88,10192.29 ccw(c14800.13,10195.6) 14805.13,10195.51 ; 14803.88,10192.29 ccw(c14800.13,10195.6) 14805.13,10195.51 ; 14803.88,10192.29 ccw(c14800.13,10195.6) 14805.13,10195.51 ; 14803.88,10192.29 ccw(c14800.13,10195.6) 14805.13,10195.51 ; 14803.88,10192.29 ccw(c14800.13,10195.6) 14805.13,10195.51 ; 14803.88,10192.29 ccw(c14800.13,10195.6) 14805.13,10195.51 ; 14803.88,10192.29 ccw(c14800.13,10195.6) 14805.13,10195.51 ; 14803.88,10192.29 ccw(c14800.13,10195.6) 14805.13,10195.51 ; 14803.88,10192.29 ccw(c14800.13,10195.6) 14805.13,10195.51 ; 14803.88,10192.29 ccw(c14800.13,10195.6) 14805.13,10195.51 ; 14803.88,10192.29 ccw(c14800.13,10195.6) 14805.13,10195.51 ; 14804.64,10323.38 cw(c14809.64,10323.38) 14806.09,10326.9 ; 14804.64,10323.38 cw(c14809.64,10323.38) 14806.09,10326.9 ; 14804.64,10323.38 cw(c14809.64,10323.38) 14806.09,10326.9 ; 14804.64,10323.38 cw(c14809.64,10323.38) 14806.09,10326.9 ; 14804.64,10323.38 cw(c14809.64,10323.38) 14806.09,10326.9 ; 14804.64,10323.38 cw(c14809.64,10323.38) 14806.09,10326.9 ; 14804.64,10323.38 cw(c14809.64,10323.38) 14806.09,10326.9 ; 14804.64,10323.38 cw(c14809.64,10323.38) 14806.09,10326.9 ; 14804.64,10323.38 cw(c14809.64,10323.38) 14806.09,10326.9 ; 14804.64,10323.38 cw(c14809.64,10323.38) 14806.09,10326.9 ; 14804.64,10323.38 cw(c14809.64,10323.38) 14806.09,10326.9 ; 14804.64,10323.38 cw(c14809.64,10323.38) 14806.09,10326.9 ; 14804.64,10323.38 cw(c14809.64,10323.38) 14806.09,10326.9 ; 14804.64,10323.38 cw(c14809.64,10323.38) 14806.09,10326.9 ; 14804.64,10323.38 cw(c14809.64,10323.38) 14806.09,10326.9 ; 14804.64,10323.38 cw(c14809.64,10323.38) 14806.09,10326.9
  Bottom 6+gnd w5: U4.31@14804.89,10232.03 v1@14804.89,10293.87
AA7: IC2.53 U3.32 U4.32 | length 1309.9
  Top Layer 1 w5: U3.32@14836.39,9771.46 v1@14836.39,9833.49 ; v1(15089.85,10524.63) 15100.09,10514.39 15100.09,10462.11 IC2.53@15100.32,10461.87
  Layer 3 w5: v1(14836.63,9833.49) 14836.63,10145.64 ; 14836.63,10195.56 14836.63,10293.63 v1(14836.14,10294.12) 14836.14,10340.73 ; v1(15089.85,10524.63) 15073.95,10504.96 ; 14835.17,10149.12 cw(c14831.63,10145.59) 14836.63,10145.68 ; 14835.17,10149.12 cw(c14831.63,10145.59) 14836.63,10145.68 ; 14835.17,10149.12 cw(c14831.63,10145.59) 14836.63,10145.68 ; 14835.17,10149.12 cw(c14831.63,10145.59) 14836.63,10145.68 ; 14835.17,10149.12 cw(c14831.63,10145.59) 14836.63,10145.68 ; 14835.17,10149.12 cw(c14831.63,10145.59) 14836.63,10145.68 ; 14835.17,10149.12 cw(c14831.63,10145.59) 14836.63,10145.68 ; 14835.17,10149.12 cw(c14831.63,10145.59) 14836.63,10145.68 ; 14835.17,10149.12 cw(c14831.63,10145.59) 14836.63,10145.68 ; 14835.17,10149.12 cw(c14831.63,10145.59) 14836.63,10145.68 ; 14835.17,10149.12 cw(c14831.63,10145.59) 14836.63,10145.68 ; 14835.17,10149.12 cw(c14831.63,10145.59) 14836.63,10145.68 ; 14835.17,10149.12 cw(c14831.63,10145.59) 14836.63,10145.68 ; 14835.17,10149.12 cw(c14831.63,10145.59) 14836.63,10145.68 ; 14835.17,10149.12 cw(c14831.63,10145.59) 14836.63,10145.68 ; 14835.17,10149.12 cw(c14831.63,10145.59) 14836.63,10145.68 ; 14835.17,10149.12 14825.25,10159.1 cw(c14836.14,10169.94) 14824.62,10180.12 14835.38,10192.29 ; 14835.38,10192.29 ccw(c14831.63,10195.6) 14836.63,10195.51 ; 14835.38,10192.29 ccw(c14831.63,10195.6) 14836.63,10195.51 ; 14835.38,10192.29 ccw(c14831.63,10195.6) 14836.63,10195.51 ; 14835.38,10192.29 ccw(c14831.63,10195.6) 14836.63,10195.51 ; 14835.38,10192.29 ccw(c14831.63,10195.6) 14836.63,10195.51 ; 14835.38,10192.29 ccw(c14831.63,10195.6) 14836.63,10195.51 ; 14835.38,10192.29 ccw(c14831.63,10195.6) 14836.63,10195.51 ; 14835.38,10192.29 ccw(c14831.63,10195.6) 14836.63,10195.51 ; 14835.38,10192.29 ccw(c14831.63,10195.6) 14836.63,10195.51 ; 14835.38,10192.29 ccw(c14831.63,10195.6) 14836.63,10195.51 ; 14835.38,10192.29 ccw(c14831.63,10195.6) 14836.63,10195.51 ; 14835.38,10192.29 ccw(c14831.63,10195.6) 14836.63,10195.51 ; 14835.38,10192.29 ccw(c14831.63,10195.6) 14836.63,10195.51 ; 14835.38,10192.29 ccw(c14831.63,10195.6) 14836.63,10195.51 ; 14835.38,10192.29 ccw(c14831.63,10195.6) 14836.63,10195.51 ; 14835.38,10192.29 ccw(c14831.63,10195.6) 14836.63,10195.51 ; 14836.14,10340.73 cw(c14841.14,10340.73) 14837.59,10344.25 ; 14836.14,10340.73 cw(c14841.14,10340.73) 14837.59,10344.25 ; 14836.14,10340.73 cw(c14841.14,10340.73) 14837.59,10344.25 ; 14836.14,10340.73 cw(c14841.14,10340.73) 14837.59,10344.25 ; 14836.14,10340.73 cw(c14841.14,10340.73) 14837.59,10344.25 ; 14836.14,10340.73 cw(c14841.14,10340.73) 14837.59,10344.25 ; 14836.14,10340.73 cw(c14841.14,10340.73) 14837.59,10344.25 ; 14836.14,10340.73 cw(c14841.14,10340.73) 14837.59,10344.25 ; 14836.14,10340.73 cw(c14841.14,10340.73) 14837.59,10344.25 ; 14836.14,10340.73 cw(c14841.14,10340.73) 14837.59,10344.25 ; 14836.14,10340.73 cw(c14841.14,10340.73) 14837.59,10344.25 ; 14836.14,10340.73 cw(c14841.14,10340.73) 14837.59,10344.25 ; 14836.14,10340.73 cw(c14841.14,10340.73) 14837.59,10344.25 ; 14836.14,10340.73 cw(c14841.14,10340.73) 14837.59,10344.25 ; 14836.14,10340.73 cw(c14841.14,10340.73) 14837.59,10344.25 ; 14836.14,10340.73 cw(c14841.14,10340.73) 14837.59,10344.25 ; 14837.59,10344.25 14928.34,10435 cw(c14967.12,10396.01) 14944.35,10446.07 14994.57,10468.92 cw(c15021.64,10409.41) 14995.83,10469.47 15068.06,10500.5 ; 15068.06,10500.5 ccw(c15062,10514.63) 15073.95,10504.96 ; 15068.06,10500.5 ccw(c15062,10514.63) 15073.95,10504.96 ; 15068.06,10500.5 ccw(c15062,10514.63) 15073.95,10504.96 ; 15068.06,10500.5 ccw(c15062,10514.63) 15073.95,10504.96 ; 15068.06,10500.5 ccw(c15062,10514.63) 15073.95,10504.96 ; 15068.06,10500.5 ccw(c15062,10514.63) 15073.95,10504.96 ; 15068.06,10500.5 ccw(c15062,10514.63) 15073.95,10504.96 ; 15068.06,10500.5 ccw(c15062,10514.63) 15073.95,10504.96 ; 15068.06,10500.5 ccw(c15062,10514.63) 15073.95,10504.96 ; 15068.06,10500.5 ccw(c15062,10514.63) 15073.95,10504.96 ; 15068.06,10500.5 ccw(c15062,10514.63) 15073.95,10504.96 ; 15068.06,10500.5 ccw(c15062,10514.63) 15073.95,10504.96 ; 15068.06,10500.5 ccw(c15062,10514.63) 15073.95,10504.96 ; 15068.06,10500.5 ccw(c15062,10514.63) 15073.95,10504.96 ; 15068.06,10500.5 ccw(c15062,10514.63) 15073.95,10504.96 ; 15068.06,10500.5 ccw(c15062,10514.63) 15073.95,10504.96
  Bottom 6+gnd w5: U4.32@14836.39,10232.03 v1@14836.39,10293.87
AA8: IC2.54 U3.33 U4.33 | length 1491.1
  Top Layer 1 w5: U3.33@14867.88,9771.4 v1@14867.88,9833.24 ; v1(15119.85,10544.63) 15119.93,10544.55 15119.93,10461.95 IC2.54@15120.01,10461.87
  Layer 3 w5: v1(14868.13,9833.49) 14868.13,10145.64 ; 14868.13,10195.56 14868.13,10293.63 v1(14867.64,10294.12) 14867.64,10358.09 ; v1(15119.85,10544.63) 15103.02,10516.69 cw(c15089.85,10524.63) 15099.63,10512.77 15078.13,10495.05 cw(c15062,10514.63) 15072.01,10491.31 14999.83,10460.31 ; 14866.67,10149.12 cw(c14863.13,10145.59) 14868.13,10145.68 ; 14866.67,10149.12 cw(c14863.13,10145.59) 14868.13,10145.68 ; 14866.67,10149.12 cw(c14863.13,10145.59) 14868.13,10145.68 ; 14866.67,10149.12 cw(c14863.13,10145.59) 14868.13,10145.68 ; 14866.67,10149.12 cw(c14863.13,10145.59) 14868.13,10145.68 ; 14866.67,10149.12 cw(c14863.13,10145.59) 14868.13,10145.68 ; 14866.67,10149.12 cw(c14863.13,10145.59) 14868.13,10145.68 ; 14866.67,10149.12 cw(c14863.13,10145.59) 14868.13,10145.68 ; 14866.67,10149.12 cw(c14863.13,10145.59) 14868.13,10145.68 ; 14866.67,10149.12 cw(c14863.13,10145.59) 14868.13,10145.68 ; 14866.67,10149.12 cw(c14863.13,10145.59) 14868.13,10145.68 ; 14866.67,10149.12 cw(c14863.13,10145.59) 14868.13,10145.68 ; 14866.67,10149.12 cw(c14863.13,10145.59) 14868.13,10145.68 ; 14866.67,10149.12 cw(c14863.13,10145.59) 14868.13,10145.68 ; 14866.67,10149.12 cw(c14863.13,10145.59) 14868.13,10145.68 ; 14866.67,10149.12 cw(c14863.13,10145.59) 14868.13,10145.68 ; 14866.67,10149.12 14856.74,10159.1 cw(c14867.64,10169.94) 14856.11,10180.12 14866.87,10192.29 ; 14866.87,10192.29 ccw(c14863.13,10195.6) 14868.13,10195.51 ; 14866.87,10192.29 ccw(c14863.13,10195.6) 14868.13,10195.51 ; 14866.87,10192.29 ccw(c14863.13,10195.6) 14868.13,10195.51 ; 14866.87,10192.29 ccw(c14863.13,10195.6) 14868.13,10195.51 ; 14866.87,10192.29 ccw(c14863.13,10195.6) 14868.13,10195.51 ; 14866.87,10192.29 ccw(c14863.13,10195.6) 14868.13,10195.51 ; 14866.87,10192.29 ccw(c14863.13,10195.6) 14868.13,10195.51 ; 14866.87,10192.29 ccw(c14863.13,10195.6) 14868.13,10195.51 ; 14866.87,10192.29 ccw(c14863.13,10195.6) 14868.13,10195.51 ; 14866.87,10192.29 ccw(c14863.13,10195.6) 14868.13,10195.51 ; 14866.87,10192.29 ccw(c14863.13,10195.6) 14868.13,10195.51 ; 14866.87,10192.29 ccw(c14863.13,10195.6) 14868.13,10195.51 ; 14866.87,10192.29 ccw(c14863.13,10195.6) 14868.13,10195.51 ; 14866.87,10192.29 ccw(c14863.13,10195.6) 14868.13,10195.51 ; 14866.87,10192.29 ccw(c14863.13,10195.6) 14868.13,10195.51 ; 14866.87,10192.29 ccw(c14863.13,10195.6) 14868.13,10195.51 ; 14867.64,10358.09 cw(c14872.64,10358.09) 14869.08,10361.6 ; 14867.64,10358.09 cw(c14872.64,10358.09) 14869.08,10361.6 ; 14867.64,10358.09 cw(c14872.64,10358.09) 14869.08,10361.6 ; 14867.64,10358.09 cw(c14872.64,10358.09) 14869.08,10361.6 ; 14867.64,10358.09 cw(c14872.64,10358.09) 14869.08,10361.6 ; 14867.64,10358.09 cw(c14872.64,10358.09) 14869.08,10361.6 ; 14867.64,10358.09 cw(c14872.64,10358.09) 14869.08,10361.6 ; 14867.64,10358.09 cw(c14872.64,10358.09) 14869.08,10361.6 ; 14867.64,10358.09 cw(c14872.64,10358.09) 14869.08,10361.6 ; 14867.64,10358.09 cw(c14872.64,10358.09) 14869.08,10361.6 ; 14867.64,10358.09 cw(c14872.64,10358.09) 14869.08,10361.6 ; 14867.64,10358.09 cw(c14872.64,10358.09) 14869.08,10361.6 ; 14867.64,10358.09 cw(c14872.64,10358.09) 14869.08,10361.6 ; 14867.64,10358.09 cw(c14872.64,10358.09) 14869.08,10361.6 ; 14867.64,10358.09 cw(c14872.64,10358.09) 14869.08,10361.6 ; 14867.64,10358.09 cw(c14872.64,10358.09) 14869.08,10361.6 ; 14869.08,10361.6 14935.39,10427.91 ; 14935.39,10427.91 cw(c14967.12,10396.01) 14948.49,10436.97 ; 14935.39,10427.91 cw(c14967.12,10396.01) 14948.49,10436.97 ; 14935.39,10427.91 cw(c14967.12,10396.01) 14948.49,10436.97 ; 14935.39,10427.91 cw(c14967.12,10396.01) 14948.49,10436.97 ; 14935.39,10427.91 cw(c14967.12,10396.01) 14948.49,10436.97 ; 14935.39,10427.91 cw(c14967.12,10396.01) 14948.49,10436.97 ; 14935.39,10427.91 cw(c14967.12,10396.01) 14948.49,10436.97 ; 14935.39,10427.91 cw(c14967.12,10396.01) 14948.49,10436.97 ; 14935.39,10427.91 cw(c14967.12,10396.01) 14948.49,10436.97 ; 14935.39,10427.91 cw(c14967.12,10396.01) 14948.49,10436.97 ; 14935.39,10427.91 cw(c14967.12,10396.01) 14948.49,10436.97 ; 14935.39,10427.91 cw(c14967.12,10396.01) 14948.49,10436.97 ; 14935.39,10427.91 cw(c14967.12,10396.01) 14948.49,10436.97 ; 14935.39,10427.91 cw(c14967.12,10396.01) 14948.49,10436.97 ; 14935.39,10427.91 cw(c14967.12,10396.01) 14948.49,10436.97 ; 14935.39,10427.91 cw(c14967.12,10396.01) 14948.49,10436.97 ; 14948.49,10436.97 14998.71,10459.81 ; 14998.71,10459.81 cw(c15021.64,10409.41) 14999.83,10460.31 ; 14998.71,10459.81 cw(c15021.64,10409.41) 14999.83,10460.31 ; 14998.71,10459.81 cw(c15021.64,10409.41) 14999.83,10460.31 ; 14998.71,10459.81 cw(c15021.64,10409.41) 14999.83,10460.31 ; 14998.71,10459.81 cw(c15021.64,10409.41) 14999.83,10460.31 ; 14998.71,10459.81 cw(c15021.64,10409.41) 14999.83,10460.31 ; 14998.71,10459.81 cw(c15021.64,10409.41) 14999.83,10460.31 ; 14998.71,10459.81 cw(c15021.64,10409.41) 14999.83,10460.31 ; 14998.71,10459.81 cw(c15021.64,10409.41) 14999.83,10460.31 ; 14998.71,10459.81 cw(c15021.64,10409.41) 14999.83,10460.31 ; 14998.71,10459.81 cw(c15021.64,10409.41) 14999.83,10460.31 ; 14998.71,10459.81 cw(c15021.64,10409.41) 14999.83,10460.31 ; 14998.71,10459.81 cw(c15021.64,10409.41) 14999.83,10460.31 ; 14998.71,10459.81 cw(c15021.64,10409.41) 14999.83,10460.31 ; 14998.71,10459.81 cw(c15021.64,10409.41) 14999.83,10460.31 ; 14998.71,10459.81 cw(c15021.64,10409.41) 14999.83,10460.31
  Bottom 6+gnd w5: U4.33@14867.88,10232.03 v1@14867.88,10293.87
AA9: IC2.55 U3.34 U4.34 | length 1334.1
  Top Layer 1 w5: U3.34@14899.38,9771.46 v1@14899.38,9833.49 ; IC2.55@15139.69,10461.87 v1@15139.69,10514.16
  Layer 3 w5: v1(14899.62,9833.49) 14899.62,10145.64 ; 14899.62,10195.56 14899.62,10293.63 v1(14899.13,10294.12) 14899.13,10361.3 ; v1(15139.46,10514.39) 15088.46,10477.77 ; 14898.17,10149.12 cw(c14894.62,10145.59) 14899.62,10145.68 ; 14898.17,10149.12 cw(c14894.62,10145.59) 14899.62,10145.68 ; 14898.17,10149.12 cw(c14894.62,10145.59) 14899.62,10145.68 ; 14898.17,10149.12 cw(c14894.62,10145.59) 14899.62,10145.68 ; 14898.17,10149.12 cw(c14894.62,10145.59) 14899.62,10145.68 ; 14898.17,10149.12 cw(c14894.62,10145.59) 14899.62,10145.68 ; 14898.17,10149.12 cw(c14894.62,10145.59) 14899.62,10145.68 ; 14898.17,10149.12 cw(c14894.62,10145.59) 14899.62,10145.68 ; 14898.17,10149.12 cw(c14894.62,10145.59) 14899.62,10145.68 ; 14898.17,10149.12 cw(c14894.62,10145.59) 14899.62,10145.68 ; 14898.17,10149.12 cw(c14894.62,10145.59) 14899.62,10145.68 ; 14898.17,10149.12 cw(c14894.62,10145.59) 14899.62,10145.68 ; 14898.17,10149.12 cw(c14894.62,10145.59) 14899.62,10145.68 ; 14898.17,10149.12 cw(c14894.62,10145.59) 14899.62,10145.68 ; 14898.17,10149.12 cw(c14894.62,10145.59) 14899.62,10145.68 ; 14898.17,10149.12 cw(c14894.62,10145.59) 14899.62,10145.68 ; 14898.17,10149.12 14888.24,10159.1 cw(c14899.13,10169.94) 14887.61,10180.12 14898.37,10192.29 ; 14898.37,10192.29 ccw(c14894.62,10195.6) 14899.62,10195.51 ; 14898.37,10192.29 ccw(c14894.62,10195.6) 14899.62,10195.51 ; 14898.37,10192.29 ccw(c14894.62,10195.6) 14899.62,10195.51 ; 14898.37,10192.29 ccw(c14894.62,10195.6) 14899.62,10195.51 ; 14898.37,10192.29 ccw(c14894.62,10195.6) 14899.62,10195.51 ; 14898.37,10192.29 ccw(c14894.62,10195.6) 14899.62,10195.51 ; 14898.37,10192.29 ccw(c14894.62,10195.6) 14899.62,10195.51 ; 14898.37,10192.29 ccw(c14894.62,10195.6) 14899.62,10195.51 ; 14898.37,10192.29 ccw(c14894.62,10195.6) 14899.62,10195.51 ; 14898.37,10192.29 ccw(c14894.62,10195.6) 14899.62,10195.51 ; 14898.37,10192.29 ccw(c14894.62,10195.6) 14899.62,10195.51 ; 14898.37,10192.29 ccw(c14894.62,10195.6) 14899.62,10195.51 ; 14898.37,10192.29 ccw(c14894.62,10195.6) 14899.62,10195.51 ; 14898.37,10192.29 ccw(c14894.62,10195.6) 14899.62,10195.51 ; 14898.37,10192.29 ccw(c14894.62,10195.6) 14899.62,10195.51 ; 14898.37,10192.29 ccw(c14894.62,10195.6) 14899.62,10195.51 ; 14899.13,10361.3 cw(c14904.13,10361.3) 14900.58,10364.82 ; 14899.13,10361.3 cw(c14904.13,10361.3) 14900.58,10364.82 ; 14899.13,10361.3 cw(c14904.13,10361.3) 14900.58,10364.82 ; 14899.13,10361.3 cw(c14904.13,10361.3) 14900.58,10364.82 ; 14899.13,10361.3 cw(c14904.13,10361.3) 14900.58,10364.82 ; 14899.13,10361.3 cw(c14904.13,10361.3) 14900.58,10364.82 ; 14899.13,10361.3 cw(c14904.13,10361.3) 14900.58,10364.82 ; 14899.13,10361.3 cw(c14904.13,10361.3) 14900.58,10364.82 ; 14899.13,10361.3 cw(c14904.13,10361.3) 14900.58,10364.82 ; 14899.13,10361.3 cw(c14904.13,10361.3) 14900.58,10364.82 ; 14899.13,10361.3 cw(c14904.13,10361.3) 14900.58,10364.82 ; 14899.13,10361.3 cw(c14904.13,10361.3) 14900.58,10364.82 ; 14899.13,10361.3 cw(c14904.13,10361.3) 14900.58,10364.82 ; 14899.13,10361.3 cw(c14904.13,10361.3) 14900.58,10364.82 ; 14899.13,10361.3 cw(c14904.13,10361.3) 14900.58,10364.82 ; 14899.13,10361.3 cw(c14904.13,10361.3) 14900.58,10364.82 ; 14900.58,10364.82 14949.5,10413.74 cw(c14967.12,10396.01) 14956.79,10418.77 15006.96,10441.59 ; 15006.96,10441.59 cw(c15021.64,10409.41) 15007.77,10441.95 ; 15006.96,10441.59 cw(c15021.64,10409.41) 15007.77,10441.95 ; 15006.96,10441.59 cw(c15021.64,10409.41) 15007.77,10441.95 ; 15006.96,10441.59 cw(c15021.64,10409.41) 15007.77,10441.95 ; 15006.96,10441.59 cw(c15021.64,10409.41) 15007.77,10441.95 ; 15006.96,10441.59 cw(c15021.64,10409.41) 15007.77,10441.95 ; 15006.96,10441.59 cw(c15021.64,10409.41) 15007.77,10441.95 ; 15006.96,10441.59 cw(c15021.64,10409.41) 15007.77,10441.95 ; 15006.96,10441.59 cw(c15021.64,10409.41) 15007.77,10441.95 ; 15006.96,10441.59 cw(c15021.64,10409.41) 15007.77,10441.95 ; 15006.96,10441.59 cw(c15021.64,10409.41) 15007.77,10441.95 ; 15006.96,10441.59 cw(c15021.64,10409.41) 15007.77,10441.95 ; 15006.96,10441.59 cw(c15021.64,10409.41) 15007.77,10441.95 ; 15006.96,10441.59 cw(c15021.64,10409.41) 15007.77,10441.95 ; 15006.96,10441.59 cw(c15021.64,10409.41) 15007.77,10441.95 ; 15006.95,10441.59 cw(c15021.64,10409.41) 15007.77,10441.95 ; 15007.77,10441.95 15079.9,10472.94 ; 15079.9,10472.94 ccw(c15062,10514.63) 15088.46,10477.77 ; 15079.9,10472.94 ccw(c15062,10514.63) 15088.46,10477.77 ; 15079.9,10472.94 ccw(c15062,10514.63) 15088.46,10477.77 ; 15079.9,10472.94 ccw(c15062,10514.63) 15088.46,10477.77 ; 15079.9,10472.94 ccw(c15062,10514.63) 15088.46,10477.77 ; 15079.9,10472.94 ccw(c15062,10514.63) 15088.46,10477.77 ; 15079.9,10472.94 ccw(c15062,10514.63) 15088.46,10477.77 ; 15079.9,10472.94 ccw(c15062,10514.63) 15088.46,10477.77 ; 15079.9,10472.94 ccw(c15062,10514.63) 15088.46,10477.77 ; 15079.9,10472.94 ccw(c15062,10514.63) 15088.46,10477.77 ; 15079.9,10472.94 ccw(c15062,10514.63) 15088.46,10477.77 ; 15079.9,10472.94 ccw(c15062,10514.63) 15088.46,10477.77 ; 15079.9,10472.94 ccw(c15062,10514.63) 15088.46,10477.77 ; 15079.9,10472.94 ccw(c15062,10514.63) 15088.46,10477.77 ; 15079.9,10472.94 ccw(c15062,10514.63) 15088.46,10477.77 ; 15079.9,10472.94 ccw(c15062,10514.63) 15088.46,10477.77
  Bottom 6+gnd w5: U4.34@14899.38,10232.03 v1@14899.38,10293.87